# Altium PCB VFD_CLOCK_BASE_BOARD.PcbDoc
Units mm, origin at the board's own origin, x right, y up, seen from the top; angles counter-clockwise.
Board outline 96.52 x 22.23 mm, 2 copper layers (Top Layer, Bottom Layer); 55 components, 56 nets, 214 pads, 42 vias.
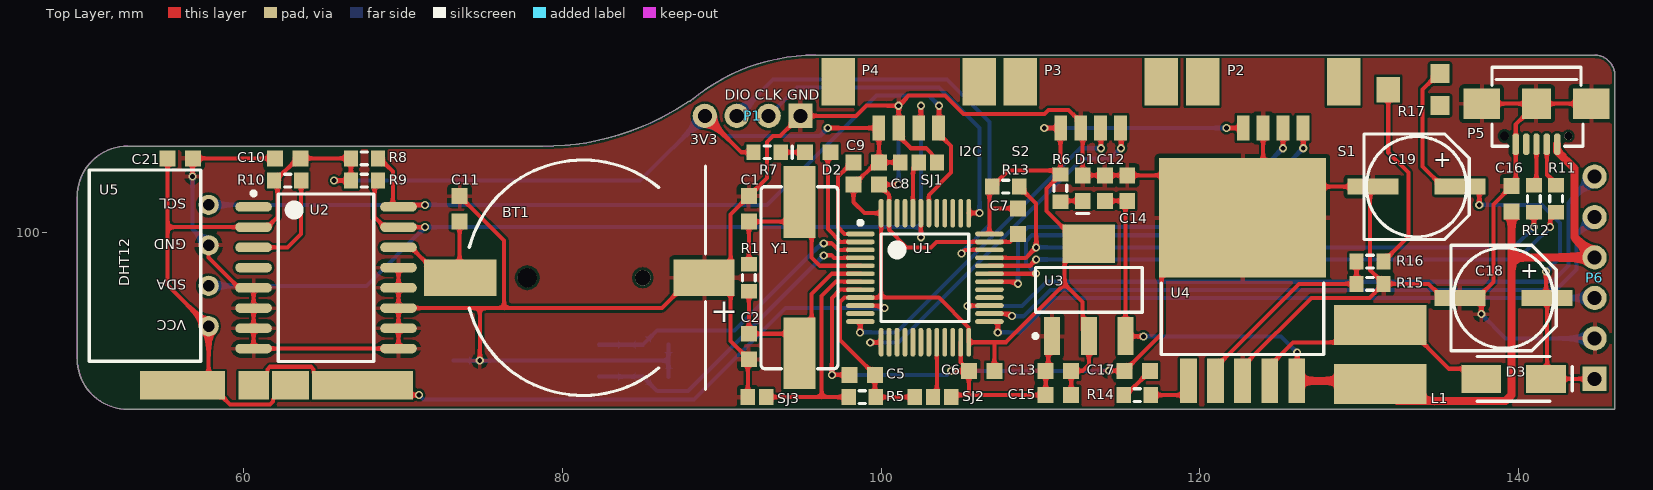
[diagram p0: Top Layer view]
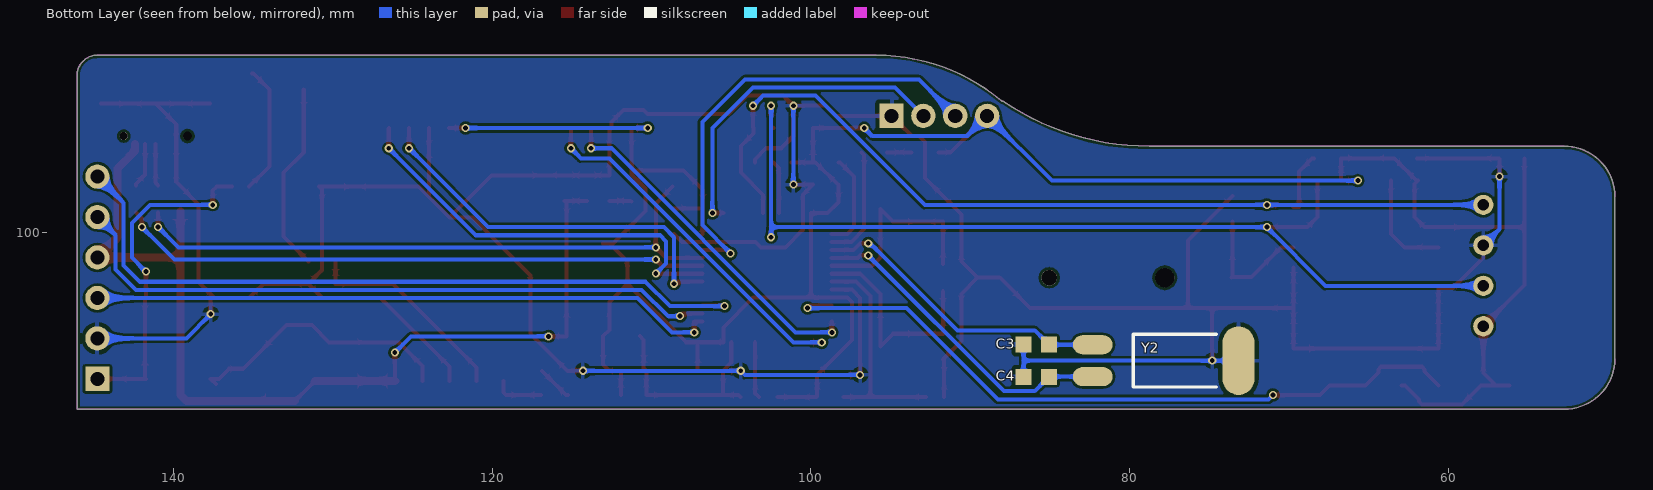
[diagram p1: Bottom Layer view, seen from below]

## Layer stack, top to bottom
Top Solder: solder mask 0.0102, Solder Resist, Dk 3.5
Top Layer: signal copper 0.0356
Dielectric 1: dielectric 0.32, FR-4, Dk 4.8
Bottom Layer: signal copper 0.0356
Bottom Solder: solder mask 0.0102, Solder Resist, Dk 3.5

## Board outline
49.53,92.076 49.53,102.235 cw(c52.705,102.235) 52.705,105.411 78.742,105.411 ccw(c78.789,121.618) 87.925,108.231 88.006,108.231 88.048,108.273 cw(c95.885,98.933) 95.885,111.125 144.78,111.125 cw(c144.78,109.855) 146.05,109.855 146.05,88.9 52.705,88.9 cw(c52.705,92.075)

## Design rules (kind name [scope] priority, off if disabled: settings)
Clearance [All] p1: gap=0.152 ignorepadtopadclearanceinfootprint=FALSE
MinimumSolderMaskSliver [All] p1: minsoldermaskwidth=0.025
PolygonConnect [All] p1: connectstyle=Relief reliefconductorwidth=0.254 reliefentries=4 polygonreliefangle="90 Angle" airgapwidth=0.254
RoutingVias [All] p1: holewidth=0.305 width=0.508 viastyle="Through Hole" minholewidth=0.305 minwidth=0.508 maxholewidth=0.711 maxwidth=1.27
SolderMaskExpansion [All] p1: expansion=0.102
Width [All] p1: maxlimit=0.508 minlimit=0.203 preferedwidth=0.254
29 further rules are at their usual default settings.

## Components (designator, comment, footprint, x,y, rotation, side; value= is the part's Value field where it differs from the comment)
BT1 "CR1220" BAT_CR1220 81.28,97.155 r0 top
C1 "22pF" 0603C_N 91.694,101.473 r270 top value=100pF
C2 "22pF" 0603C_N 91.694,92.837 r90 top value=100pF
C3 "22pF" 0603C_N 85.852,92.964 r180 bottom value=100pF
C4 "22pF" 0603C_N 85.852,90.932 r180 bottom value=100pF
C5 "0.1uF" 0603C_N 98.806,91.059 r0 top value=100pF
C6 "0.1uF" 0603C_N 106.299,91.313 r0 top value=100pF
C7 "0.1uF" 0603C_N 108.585,100.711 r90 top value=100pF
C8 "0.1uF" 0603C_N 99.06,102.997 r180 top value=100pF
C9 "0.1uF" 0603C_N 99.06,104.394 r180 top value=100pF
C10 "0.1uF" 0603C_N 62.738,104.648 r0 top value=100pF
C11 "0.1uF" 0603C_N 73.533,101.473 r270 top value=100pF
C12 "10uF" 0603C_N 114.046,102.781 r270 top value=100pF
C13 "22uF" 0603C_N 111.125,91.313 r0 top value=100pF
C14 "0.1uF" 0603C_N 115.443,102.781 r270 top value=100pF
C15 "0.1uF" 0603C_N 111.125,89.789 r0 top value=100pF
C16 "0.1uF" 0603C_N 139.573,102.108 r270 top value=100pF
C17 "0.33uF" 0603C_N 116.078,91.313 r0 top value=100pF
C18 "10uF" CAP_SMD_SIZE_D_F6.3 139.065,95.885 r180 top value=100pF
C19 "10uF" CAP_SMD_SIZE_D_F6.3 133.604,102.87 r180 top value=100pF
C21 "0.1uF" 0603C_N 56.007,104.648 r180 top value=100pF
D1 "0603RED" 0603LED_N 112.649,102.781 r90 top
D2 "0603YELLOW" 0603LED_N 96.012,105.029 r0 top
D3 "1N5822" SMA 139.7,90.805 r0 top
L1 "47uH" CD54 131.318,92.329 r180 top value=10mH
P1 "SWD" CONNECTER_2.0_1X4 94.932,107.315 r180 top
P2 "Serial1" SH1.25_4P_SMT 124.597,106.553 r0 top
P3 "Serial2" SH1.25_4P_SMT 113.147,106.553 r0 top
P4 "I2C" SH1.25_4P_SMT 101.727,106.553 r0 top
P5 "micro usb" USB_MICRO 141.129,108.077 r180 top
P6 "Header 6" CONNECTER_2.54_1X6 144.78,90.805 r90 top locked
R1 "1M" 0603R_N 91.694,97.155 r90 top value=1K
R5 "10K" 0603R_N 98.806,89.662 r0 top value=1K
R6 "2.2K" 0603R_N 111.252,102.781 r270 top value=1K
R7 "1.5K" 0603R_N 92.837,105.029 r0 top value=1K
R8 "4.7K" 0603R_N 67.564,104.648 r180 top value=1K
R9 "4.7K" 0603R_N 67.564,103.251 r180 top value=1K
R10 "4.7K" 0603R_N 62.738,103.251 r180 top value=1K
R11 "10R" 0603R_N 142.367,102.108 r270 top value=1K
R12 "10R" 0603R_N 140.97,102.108 r270 top value=1K
R13 "1.5K" 0603R_N 107.823,102.87 r180 top value=1K
R14 "2.2K" 0603R_N 116.078,89.789 r180 top value=1K
R15 "1.5K" 0603R_N 130.683,96.774 r0 top value=1K
R16 "10K" 0603R_N 130.683,98.171 r0 top value=1K
R17 "50K" POT_3*3 133.477,108.966 r90 top value=1K
SJ1 "SJ_2" SOLDER_JUMPER_2WAY 102.355,104.394 r0 top
SJ2 "SJ_2" SOLDER_JUMPER_2WAY 103.251,89.662 r0 top
SJ3 "SJ" SOLDER_JUMPER 92.202,89.662 r180 top
U1 "ATmega328-AU" TQFP48_N 102.743,97.155 r0 top
U2 "DS3231" SOIC127P-16N 65.151,97.155 r0 top
U3 "AMS1117-3.3" SOT223-4N 113.03,96.393 r90 top
U4 "LM2577" TO263-5 122.682,100.928 r0 top
U5 "DHT12" DHT12 57.785,97.917 r180 top
Y1 "8M" XTAL_HC-49SMD 94.869,97.155 r90 top
Y2 "32.768k" XTAL-TC26 82.296,91.948 r90 bottom

## Footprints (in the part's own frame and the unit in brackets; to place one, negate y for a bottom-side part, rotate by r counter-clockwise, add the part's x,y. Pads: shape width x height; smd on the part's side, far side on the other; paste and mask are expansions set on the pad)
0603C_N [mm] "Chip Capacitor, Body 1.6x0.8mm, IPC Medium Density"
  rect 1x1 smd: 1(-0.8,0) 2(0.8,0)
  body extent -0.87,-0.48 0.87,0.48, height 0.85
0603LED_N [mm] "Chip LED, Body 1.6x0.8mm, IPC Medium Density"
  rect 1x1 smd: 1(-0.8,0) 2(0.8,0)
  silkscreen extent -1.6,-0.4 -1.6,0.4, body extent -0.82,-0.36 0.82,0.36, height 0.68
0603R_N [mm] "Chip Resistor, Body 1.6x0.8mm, IPC Medium Density"
  rect 0.9x1 smd: 1(-0.85,0) 2(0.85,0)
  silkscreen extent -0.2,-0.4 0.2,0.4, body extent -0.85,-0.48 0.85,0.48, height 0.6
BAT_CR1220 [mm]
  rect 4.572x2.286 smd: 1(-7.7,0)
  rect 3.81x2.286 smd: 2(7.6,0)
  round 1.2 hole 1.2: 3(-3.5,0)
  round 1 hole 1: 3(3.75,0)
  silkscreen extent -7.14,-7.39 7.7,7.39, body extent -9.25,-7.5 9.25,7.5, height 4.05
CAP_SMD_SIZE_D_F6.3 [mm]
  rect 3.2x1 smd: 1(-2.736,0) 2(2.739,0)
  silkscreen extent -3.3,-3.31 3.3,3.31, body extent -3.5,-3.3 3.5,3.3, height 5.25
CD54 [mm]
  rect 5.8x2.5 smd: 1(0,1.85) 2(0,-1.85)
  body extent -2.6,-2.96 2.6,2.96, height 4.5
CONNECTER_2.0_1X4 [mil] "Connector; Header; 4 Position"
  rect 60x60 hole 35: 1(0,0)
  round 60 hole 35: 2(78.74,0) 3(157.48,0) 4(236.22,0)
CONNECTER_2.54_1X6 [mil] "Connector; Header; 6 Position"
  rect 60x60 hole 35: 1(0,0)
  round 60 hole 35: 2(100,0) 3(200,0) 4(300,0) 5(400,0) 6(500,0)
DHT12 [mil]
  round 50 hole 28: 1(0,150) 2(0,50) 3(0,-50) 4(0,-150)
  silkscreen extent 20,-236 295,236, body extent 20,-236 295,236, height 185
POT_3*3 [mm]
  rect 1.2x1.2 smd: 1(-1,-1.6) 3(1,-1.6)
  rect 1.6x1.5 smd: 2(0,1.65)
  body extent -1.8,-1.91 1.8,2.05, height 1.13
SH1.25_4P_SMT [mm]
  rect 0.8x1.6 smd: 1(-1.875,0) 2(-0.625,0) 3(0.625,0) 4(1.875,0)
  rect 2.1x3 smd: 5(-4.425,2.9) 5(4.425,2.9)
  body extent -4.93,-0.77 4.92,4.38, height 3.2
SMA [mm]
  rect 2.5x1.75 smd: 1(-2.032,0) 2(2.032,0)
  silkscreen extent -2.29,-1.4 3.68,1.4, body extent -2.6,-1.3 2.6,1.3, height 2.4
SOIC127P-16N [mm] "SOIC, 16-Leads, Body 10.3x7.5mm, Pitch 1.27mm, IPC Medium Density"
  oval 2.3x0.6 smd: 1(-4.55,4.445) 2(-4.55,3.175) 3(-4.55,1.905) 4(-4.55,0.635) 5(-4.55,-0.635) 6(-4.55,-1.905) 7(-4.55,-3.175) 8(-4.55,-4.445) 9(4.55,-4.445) 10(4.55,-3.175) 11(4.55,-1.905) 12(4.55,-0.635) 13(4.55,0.635) 14(4.55,1.905) 15(4.55,3.175) 16(4.55,4.445)
  silkscreen extent -4.67,-5.25 3,5.42, body extent -5.15,-5.1 5.15,5.1, height 3.5
SOLDER_JUMPER [mm]
  rect 0.9x1 smd: 1(-0.575,0) 2(0.575,0)
SOLDER_JUMPER_2WAY [mm]
  rect 0.9x1 smd: 1(-1.15,0) 2(0,0) 3(1.15,0)
SOT223-4N [mm] "SOT223, 4-Leads, Body 6.5x3.5mm, Pitch 2.3mm, Lead Span 7mm, IPC Medium Density"
  rect 2.4x1 smd: 1(-2.9,2.3) 2(-2.9,0) 3(-2.9,-2.3)
  rect 2.4x3.3 smd: 2(2.9,0)
  silkscreen extent -3.02,-3.35 1.4,3.47, body extent -3.5,-3.25 3.5,3.25, height 1.65
TO263-5 [mm]
  rect 1.05x2.8 smd: 1(-3.4,-10.25) 2(-1.7,-10.25) 3(0,-10.25) 4(1.7,-10.25) 5(3.4,-10.25)
  rect 10.5x7.5 smd: 3(0,0)
  silkscreen extent -5.1,-8.6 5.1,-4.1, body extent -5,-11.09 5,4.58, height 4.83
TQFP48_N [mm] "Thin QFP, 48-Leads, Body 7x7mm, Pitch 0.5mm, IPC Medium Density"
  oval 1.8x0.3 smd: 1(-4.05,2.75) 2(-4.05,2.25) 3(-4.05,1.75) 4(-4.05,1.25) 5(-4.05,0.75) 6(-4.05,0.25) 7(-4.05,-0.25) 8(-4.05,-0.75) 9(-4.05,-1.25) 10(-4.05,-1.75) 11(-4.05,-2.25) 12(-4.05,-2.75) 25(4.05,-2.75) 26(4.05,-2.25) 27(4.05,-1.75) 28(4.05,-1.25) 29(4.05,-0.75) 30(4.05,-0.25) 31(4.05,0.25) 32(4.05,0.75) 33(4.05,1.25) 34(4.05,1.75) 35(4.05,2.25) 36(4.05,2.75)
  oval 0.3x1.8 smd: 13(-2.75,-4.05) 14(-2.25,-4.05) 15(-1.75,-4.05) 16(-1.25,-4.05) 17(-0.75,-4.05) 18(-0.25,-4.05) 19(0.25,-4.05) 20(0.75,-4.05) 21(1.25,-4.05) 22(1.75,-4.05) 23(2.25,-4.05) 24(2.75,-4.05) 37(2.75,4.05) 38(2.25,4.05) 39(1.75,4.05) 40(1.25,4.05) 41(0.75,4.05) 42(0.25,4.05) 43(-0.25,4.05) 44(-0.75,4.05) 45(-1.25,4.05) 46(-1.75,4.05) 47(-2.25,4.05) 48(-2.75,4.05)
  silkscreen extent -4.17,-2.75 2.75,3.57, body extent -4.5,-4.5 4.5,4.5, height 1.63
USB_MICRO [mm] "USB方孔"
  round 0.5 hole 0.5: 0(-2,2.032)
  round 0.5 hole 0.56: 0(2,2.032)
  oct 0.4x1.35 smd: 1(-1.3,2.54) 2(-0.65,2.54) 3(0,2.54) 4(0.65,2.54) 5(1.3,2.54)
  rect 2.286x1.9 smd: 5(-3.429,0) 5(3.429,0)
  rect 1.8x1.9 smd: 5(0,0)
  silkscreen extent -2.92,-2.29 2.79,2.67, body extent -3.99,-2.78 3.99,2.65, height 2.74
XTAL-TC26 [mm]
  oval 1.2x2.5 smd: 1(-1,0) 2(1,0)
  oval 4.3x2 smd: 3(0,-9.144)
  silkscreen extent -1.65,-7.75 1.65,-2.54, body extent -1.7,-9.69 1.75,1.09, height 3.38
XTAL_HC-49SMD [mm]
  rect 4.5x2 smd: 1(-4.75,0) 2(4.75,0)
  silkscreen extent -5.71,-2.41 5.71,2.41, body extent -6.15,-2.35 6.15,2.35, height 4.3

## Part data
BT1: library part Battery, "Multicell Battery", LatestRevisionDate=17-Jul-2002, LatestRevisionNote="Re-released for DXP Platform.", PackageDescription="Battery; 2 Leads", PackageReference=BAT-2, Published=24-Mar-1999, Publisher="Altium Limited"
C1 C2 C3 C4 C5 C6 C7 C8 C9 C10 C11 C12 C13 C14 C15 C16 C17 C21: library part Cap, "Capacitor", LatestRevisionDate=17-Jul-2002, LatestRevisionNote="Re-released for DXP Platform.", PackageDescription="Radial Cap, Thru-Hole; 2 Leads; 0.3 in Pin Spacing", PackageReference=RAD-0.3, Published=8-Jun-2000, Publisher="Altium Limited"
C18 C19: library part "Cap Pol1", "Polarized Capacitor (Radial)", LatestRevisionDate=17-Jul-2002, LatestRevisionNote="Re-released for DXP Platform.", PackageDescription="Polarized Capacitor (Radial); 2 Leads", PackageReference=RB7.6-15, Published=8-Jun-2000, Publisher="Altium Limited"
D1 D2: library part LED0, "Typical INFRARED GaAs LED", LatestRevisionDate=08-Jul-2005, LatestRevisionNote="Mech Layer 1 removed.", PackageDescription="LED; 2 Leads", PackageReference=LED-0, Published=8-Jun-2000, Publisher="Altium Limited"
D3: library part "Diode 11DQ03", "Schottky Rectifier", Code_JEDEC=DO-204-AL, ComponentLink1Description="Manufacturer Link", ComponentLink1URL=http://www.irf.com/, ComponentLink2Description=Datasheet, ComponentLink2URL=http://www.irf.com/product-info/datasheets/data/11dq03.pdf, DatasheetVersion=Dec-1997, LatestRevisionDate=17-Jul-2002, LatestRevisionNote="Re-released for DXP Platform.", PackageDescription="Diode, Axial; Body 5.2 x 2.7 mm (LxDia. max), Lead Dia. 0.86 mm (max)", PackageReference=DO-204AL, Published=8-Jun-2000, Publisher="Altium Limited"
L1: library part Inductor, "Inductor", Code_IEC=1005, Code_JEITA=0402, LatestRevisionDate=29-May-2009, LatestRevisionNote="IPC-7351 Footprint Added.", PackageDescription="Chip Inductor", PackageReference=0402-A, Published=8-Jun-2000, Publisher="Altium Limited"
P1 P2 P3 P4: library part "Header 4", "Header, 4-Pin", LatestRevisionDate=17-Jul-2002, LatestRevisionNote="Re-released for DXP Platform.", Publisher="Altium Limited"
P5: library part "Header 5", "Header, 5-Pin", LatestRevisionDate=17-Jul-2002, LatestRevisionNote="Re-released for DXP Platform.", Publisher="Altium Limited"
P6: "Header, 6-Pin", LatestRevisionDate=17-Jul-2002, LatestRevisionNote="Re-released for DXP Platform.", Publisher="Altium Limited"
R1 R5 R6 R7 R8 R9 R10 R11 R12 R13 R14 R15 R16: library part Res2, "Resistor", LatestRevisionDate=17-Jul-2002, LatestRevisionNote="Re-released for DXP Platform.", PackageDescription="Axial Device, Thru-Hole; 2 Leads; 0.4 in Pin Spacing", PackageReference=AXIAL-0.4, Published=8-Jun-2000, Publisher="Altium Limited"
R17: library part Pot, "Potentiometer", LatestRevisionDate=17-Jul-2002, LatestRevisionNote="Re-released for DXP Platform.", PackageDescription="Variable Resistor, Thru-Hole; 3 Leads", PackageReference=VR5, Published=8-Jun-2000, Publisher="Altium Limited", Set Position=0.5, Sim Note="Enter the Resistance value and the set point into parameter fields."
SJ1 SJ2: library part SOLDER_JUMPER_2WAY, "2-Way Solder Jumper"
SJ3: library part SOLDER_JUMPER, "Solder Jumper"
U1: library part STM32F103C8T6, "STM32 ARM-based 32-bit MCU with 64 Kbytes Flash, 48-pin LQFP, Industrial Temperature", ComponentLink1Description="Manufacturer Link", ComponentLink1URL=www.st.com/stm32, ComponentLink2Description=Datasheet, ComponentLink2URL=http://www.st.com/stonline/products/literature/ds/13587.pdf, DatasheetVersion="rev6, Mar-2008", PackageDescription="48-Pin Low-Profile Quad Flat Pack, 7 x 7 mm Body, 0.5 mm Pitch (LQFP48)", PackageReference=LQFP48, PackageVersion=Mar-2008, Published=30-May-2008, Publisher="Altium Limited"
U3: library part AMS1117, "AMS1117"
Y1 Y2: library part XTAL, "Crystal Oscillator", LatestRevisionDate=17-Jul-2002, LatestRevisionNote="Re-released for DXP Platform.", PackageDescription="Crystal, Thru-Hole; 2 Leads; Body 3.1 x 8.2 mm (Dia.xH)", PackageReference=R38, Published=8-Jun-2000, Publisher="Altium Limited"

## Free pads (board coordinates)
  rect 5.334x1.778 smd: 1(56.134,90.399)
  rect 2.337x1.778 smd: 1(62.916,90.399)
  rect 1.905x1.778 smd: 2(60.604,90.399)
  rect 6.35x1.778 smd: 2(67.437,90.399)

## Via types
v1: diameter 0.508, hole 0.305, Top Layer to Bottom Layer, tented both sides, 42 vias

## Nets (pads, with @x,y where several pads share a name; then routed paths per layer and width w, separated by ;. In a path a pad name is that pad's centre, name@x,y a point inside that pad or via, vN(x,y) a via of type N, cw(c..) or ccw(c..) an arc to the next point about the centre after c; other vN are vias at no path point)
3V3: C5.2 C6.2 C7.2 C8.2 C9.1 C10.2 C13.2 C15.2 C21.2 P1.4 P2.1 P3.1 P4.1 pad.1 R5.2 R6.1 R7.1 R8.2 R9.2 R10.2 R13.2 SJ1.1 SJ2.1 U1.9 U1.24 U1.36 U1.48 U2.2 U3.2 U5.1 | length 167.9
  Top Layer w0.254: C21.2 55.207,100.33 ; pad.1@56.134,90.399 pad.1@56.998,90.399 ; pad.1@62.916,90.399 62.713,90.399 61.836,89.522 61.836,89.394 61.647,89.205 59.131,89.205 57.937,90.399 pad.1@56.998,90.399 ; v1(65.659,103.251) R9.2 R8.2 C10.2 63.369,104.648 61.972,103.251 R10.2 62.103,103.036 62.103,100.965 61.468,100.33 U2.2 55.207,100.33 ; P1.4 91.218,105.029 R7.1 ; v1(96.647,106.553) P4.1 99.86,106.545 C9.1 ; SJ1.1 C9.1 ; SJ2.1 R5.2 99.606,89.712 C5.2 97.409,93.256 97.409,95.631 97.683,95.905 U1.9 99.993,95.905 ; U1.36 106.793,101.473 ; C6.2 107.099,93.067 107.061,93.105 ; C7.2 106.831,101.511 106.793,101.473 ; v1(110.236,106.553) 111.232,106.553 111.252,106.533 R6.1 ; C15.2 C13.2 112.649,91.313 113.03,91.694 113.03,93.493 112.649,93.874 112.649,95.631 111.506,96.774 ; U3.2@113.03,99.293 U3.2@112.628,99.293 ; v1(121.666,106.553) P2.1 ; 55.207,100.33 55.207,96.685 U5.1 57.785,91.186 pad.1@56.998,90.399 ; C9.1 99.691,104.394 98.294,102.997 C8.2 98.26,101.892 98.947,101.205 U1.48 99.993,95.905 ; 99.993,95.905 103.612,95.905 105.493,94.024 U1.24 107.061,93.105 ; 106.793,101.473 106.793,102.69 R13.2 107.989,103.886 110.997,103.886 R6.1 ; 107.061,93.105 107.837,93.105 111.506,96.774 ; R6.1 110.363,102.742 110.363,101.346 112.416,99.293 U3.2@112.628,99.293 ; 111.506,96.774 111.506,98.171 U3.2@112.628,99.293
  Bottom Layer w0.254: v1(65.659,103.251) 84.868,103.251 P1.4 90.202,106.045 96.139,106.045 v1(96.647,106.553) ; v1(110.236,106.553) v1(121.666,106.553)
+5: C12.2 C14.2 C16.2 L1.1 P5.1 P6.4 U3.3 U4.5 | length 61.9
  Top Layer w0.254: C12.2 C14.2 115.33,101.868 U3.3 115.351,93.472 v1(116.459,93.472) ; U4.5 126.111,90.707 v1(126.111,92.456) ; L1.1@131.119,90.678 L1.1 L1.1@132.389,89.408
  Top Layer w0.508: U4.5 L1.1@131.119,90.678 ; L1.1@132.389,89.408 139.192,89.408 139.573,89.789 139.573,98.425 ; C16.2 139.573,98.425 ; P5.1 142.429,105.094 143.51,104.013 143.51,99.695 P6.4 139.573,98.425
  Bottom Layer w0.254: v1(116.459,93.472) 125.095,93.472 v1(126.111,92.456)
BOOT0: SJ1.2 U1.44 | length 3.3
  Top Layer w0.254: U1.44 101.993,104.032 SJ1.2
BOOT1: SJ2.2 U1.20 | length 3.5
  Top Layer w0.254: SJ2.2 103.493,89.904 U1.20
CLOCK: P6.6 U1.27 | length 46.4
  Top Layer w0.254: v1(105.41,95.377) 105.438,95.405 U1.27
  Bottom Layer w0.254: v1(105.41,95.377) 108.839,95.377 110.363,96.901 142.113,96.901 143.129,97.917 143.129,101.854 P6.6
D+: P5.3 R12.1 | length 2.6
  Top Layer w0.254: R12.1 141.129,103.117 P5.3
D-: P5.2 R11.1 | length 2.8
  Top Layer w0.254: P5.2 141.779,103.638 142.367,103.05 R11.1
DIN: P6.3 U1.25 | length 39.6
  Top Layer w0.254: U1.25 107.315,94.405 v1(107.315,93.726)
  Bottom Layer w0.254: v1(107.315,93.726) 108.712,93.726 110.871,95.885 P6.3
GND: BT1.2 C1.1 C2.1 C3.1 C4.1 C5.1 C6.1 C7.1 C8.1 C10.1 C11.1 C12.1 C13.1 C14.1 C15.1 C16.1 C17.1 C18.2 C19.2 C21.1 D1.2 P1.1 P2.2 P3.2 P4.2 P5.5 P6.2 R15.2 SJ1.3 SJ2.3 SJ3.2 U1.8 U1.23 U1.35 U1.47 U2.5 U2.6 U2.7 U2.8 U2.9 U2.10 U2.11 U2.12 U2.13 U3.1 U4.3 U5.3 Y2.3 | length 280.9
  Top Layer w0.254: v1(56.769,103.505) 56.769,104.61 C21.1 C10.1 ; U5.3 57.785,98.425 59.69,96.52 U2.5 U2.6 U2.7 U2.8 U2.9 U2.10 U2.11 ; U2.13 U2.12 U2.11 ; C11.1 76.327,99.479 76.327,95.25 ; v1(74.803,91.948) 74.803,95.25 ; SJ3.2 91.627,91.97 C2.1 90.551,93.18 90.551,96.139 BT1.2@89.535,97.155 ; C5.1 v1(96.901,91.059) 96.901,95.885 97.421,96.405 U1.8 ; v1(101.092,102.997) C8.1 100.493,102.364 U1.47 100.493,100.167 101.6,99.06 103.124,99.06 103.469,99.405 U1.35 108.079,99.405 C7.1 ; SJ1.3 103.505,104.589 102.811,105.283 101.854,105.283 101.102,106.035 P4.2 v1@101.102,107.96 ; v1(104.394,91.313) C6.1 ; SJ2.3 104.528,89.789 105.537,89.789 ; U1.23 104.993,91.819 C6.1 ; U3.1 110.49,93.253 110.49,91.478 C13.1 C15.1 105.537,89.789 ; v1(114.3,91.313) C17.1 117.602,93.637 117.602,97.282 121.248,100.928 U4.3@122.682,100.928 ; U4.3@122.682,90.678 122.682,91.567 127.008,95.893 130.652,95.893 R15.2 ; P2.2 U4.3@123.972,102.218 ; v1(137.668,94.869) 137.668,96.012 C18.2@137.605,96.075 ; P5.5@137.7,108.077 P5.5@141.129,108.077 ; P5.5@144.558,108.077 P5.5@141.129,108.077 ; U2.11 74.803,95.25 ; 74.803,95.25 76.327,95.25 ; 76.327,95.25 86.233,95.25 88.138,97.155 BT1.2 BT1.2@89.535,97.155 ; BT1.2@89.535,97.155 90.551,98.171 90.551,101.13 C1.1 92.837,103.416 92.837,105.664 93.218,106.045 93.662,106.045 P1.1 98.425,107.315 99.07,107.96 v1@101.102,107.96 ; v1@101.102,107.96 101.727,108.585 104.013,108.585 105.156,107.442 110.236,107.442 110.49,107.696 111.76,107.696 112.522,106.934 P3.2 112.649,106.426 D1.2 C12.1 C14.1 120.029,103.581 U4.3@122.682,100.928 ; C6.1 105.499,89.827 105.537,89.789 ; U4.3@122.682,100.928 U4.3@123.972,102.218 ; U4.3@123.972,102.218 124.624,102.87 C19.2 130.683,102.688 130.683,97.624 R15.2 ; R15.2 134.366,96.774 135.255,95.885 C18.2 137.414,95.885 C18.2@137.605,96.075 ; C18.2@137.605,96.075 138.43,96.901 138.43,101.765 C16.1 139.829,103.164 139.829,105.537 139.829,106.777 P5.5@141.129,108.077
  Bottom Layer w0.254: v1(56.769,103.505) 56.769,100.203 U5.3 ; Y2.3 v1(74.803,91.948) 86.652,91.948 ; C4.1 86.652,91.948 ; C3.1 86.652,91.948 ; v1(96.901,91.059) 104.14,91.059 v1(104.394,91.313) v1(114.3,91.313) ; v1(101.092,102.997) v1(101.092,107.95) ; v1(137.668,94.869) 139.192,93.345 P6.2
HV: C18.1 C19.1 D3.2 P6.1 R17.3 | length 29.1
  Top Layer w0.254: R17.3 134.985,109.966 133.985,108.966 133.985,104.14 C19.1@135.255,102.87 ; C19.1 137.287,102.87 137.541,102.616 v1(137.541,101.727) ; v1(141.732,97.536) 141.732,95.954 C18.1 141.801,90.874 D3.2 P6.1
  Bottom Layer w0.254: v1(137.541,101.727) 141.478,101.727 142.621,100.584 142.621,98.425 v1(141.732,97.536)
ID: P5.4
INT: R10.1 U2.3 | length 6.7
  Top Layer w0.254: U2.3 62.738,99.06 63.588,99.91 R10.1
LATCH: P6.5 U1.26 | length 41.9
  Top Layer w0.254: U1.26 108.041,94.905 v1(108.204,94.742)
  Bottom Layer w0.254: v1(108.204,94.742) 108.966,94.742 110.617,96.393 142.367,96.393 143.637,97.663 143.637,99.822 P6.5
NetBT1_1: BT1.1 C11.2 U2.14 | length 8.1
  Top Layer w0.254: U2.14 70.485,99.06 72.343,97.202 BT1.1@73.533,97.202 ; C11.2 BT1.1@73.533,97.202 ; BT1.1 BT1.1@73.533,97.202
NetC1_2: C1.2 R1.2 U1.5 Y1.2 | length 13.3
  Top Layer w0.254: R1.2 C1.2 94.831,100.673 95.631,101.473 95.631,98.425 96.151,97.905 U1.5
NetC2_2: C2.2 R1.1 U1.6 Y1.1 | length 13.8
  Top Layer w0.254: R1.1 C2.2 94.831,93.637 95.631,92.837 95.631,96.139 96.897,97.405 U1.6
NetC3_2: C3.2 U1.3 Y2.2 | length 19.2
  Top Layer w0.254: v1(96.393,99.314) 96.901,99.314 97.31,98.905 U1.3
  Bottom Layer w0.254: Y2.2 85.036,92.948 C3.2 85.941,93.853 90.796,93.853 96.257,99.314 v1(96.393,99.314)
NetC4_2: C4.2 U1.4 Y2.1 | length 20.4
  Top Layer w0.254: v1(96.393,98.552) 96.901,98.552 97.048,98.405 U1.4
  Bottom Layer w0.254: Y2.1 85.036,90.948 C4.2 85.941,90.043 87.884,90.043 v1(96.393,98.552)
NetC9_2: C9.2 U1.1 | length 6.1
  Top Layer w0.254: C9.2 98.171,104.394 97.282,103.505 97.282,100.33 97.707,99.905 U1.1
NetC17_2: C17.2 R14.2 | length 2.3
  Top Layer w0.254: R14.2 115.354,89.789 C17.2
NetD1_1: D1.1 R6.2 | length 1.4
  Top Layer w0.254: R6.2 111.302,101.981 D1.1
NetD2_1: D2.1 R7.2 | length 1.5
  Top Layer w0.254: R7.2 D2.1
NetD3_1: D3.1 L1.2 U4.4 | length 17.1
  Top Layer w0.254: U4.4 124.382,91.616 125.857,93.091 130.23,93.091 L1.2 132.897,94.179 135.636,91.44 136.525,91.44 137.16,90.805 D3.1 D3.1@137.342,90.479
NetR14_1: R14.1 U4.1 | length 3.2
  Top Layer w0.254: R14.1 119.126,89.789 119.282,89.945 U4.1
NetR15_1: R15.1 R16.1 U4.2 | length 13.3
  Top Layer w0.254: U4.2 120.982,91.518 126.238,96.774 R15.1 R16.1
NetR16_2: R16.2 R17.2 | length 12
  Top Layer w0.254: R16.2 133.096,99.734 133.096,103.759 131.827,105.028 R17.2
NRST: R5.1 SJ3.1 U1.7 | length 14.3
  Top Layer w0.254: SJ3.1 96.266,89.662 ; R5.1 96.266,89.662 ; U1.7 97.159,96.905 96.266,96.012 96.266,89.662
PA0: pad.2 U1.10 | length 45.1
  Top Layer w0.254: pad.2@60.604,90.399 61.468,91.262 61.468,91.403 61.632,91.567 64.2,91.567 64.364,91.403 64.364,91.211 65.176,90.399 67.437,90.399 68.047,89.789 v1(70.993,89.789) ; U1.10 100.048,95.405 v1(100.203,95.25)
  Bottom Layer w0.254: v1(70.993,89.789) 71.263,89.519 88.249,89.519 93.98,95.25 v1(100.203,95.25)
PA1: U1.11
PA4: U1.14
PA5: U1.15
PA6: U1.16
PA7: U1.17
PA8: U1.29
PA11: R11.2 U1.32 | length 37.3
  Top Layer w0.254: U1.32 109.335,97.905 v1(109.728,98.298) ; v1(141.986,100.33) 141.986,100.877 R11.2
  Bottom Layer w0.254: v1(109.728,98.298) 139.954,98.298 v1(141.986,100.33)
PA12: R12.2 R13.1 U1.33 | length 40.1
  Top Layer w0.254: U1.33 109.073,98.405 v1(109.728,99.06) 109.728,101.815 R13.1 ; v1(140.97,100.33) R12.2
  Bottom Layer w0.254: v1(109.728,99.06) 139.7,99.06 v1(140.97,100.33)
PA15: U1.38
PB0: U1.18
PB1: U1.19
PB3: U1.39
PB4: U1.40
PB5: U1.41
PB8: U1.45
PB9: U1.46
PB10: U1.21
PB11: U1.22
PB15: U1.28
PC13: D2.2 U1.2 | length 7.3
  Top Layer w0.254: D2.2 96.647,104.864 96.647,100.203 97.445,99.405 U1.2
RX1: P2.4 U1.31 | length 26.3
  Top Layer w0.254: U1.31 109.724,97.405 v1(109.728,97.409) ; P2.4 126.492,106.533 v1(126.492,105.283)
  Bottom Layer w0.254: v1(109.728,97.409) 109.093,98.044 109.093,99.441 109.474,99.822 121.031,99.822 v1(126.492,105.283)
RX2: P3.4 U1.13 | length 22.8
  Top Layer w0.254: v1(99.314,93.091) 99.979,93.091 U1.13 ; P3.4 115.062,106.513 v1(115.062,105.283)
  Bottom Layer w0.254: v1(99.314,93.091) 101.092,93.091 112.649,104.648 114.427,104.648 v1(115.062,105.283)
SCL: P4.4 R8.1 U1.42 U2.16 U5.4 | length 62.2
  Top Layer w0.254: R8.1 68.525,104.648 69.342,103.831 69.342,101.6 U2.16 69.828,101.727 v1(71.374,101.727) ; U1.42 102.993,102.358 104.394,103.759 104.394,105.41 103.602,106.202 P4.4 103.632,106.583 v1(103.632,107.95)
  Bottom Layer w0.254: U5.4 v1(71.374,101.727) 92.837,101.727 99.695,108.585 102.997,108.585 v1(103.632,107.95)
SDA: P4.3 R9.1 U1.43 U2.15 U5.2 | length 63
  Top Layer w0.254: R9.1@68.199,103.124 68.199,100.965 68.834,100.33 U2.15 v1(71.374,100.33) ; P4.3 102.489,106.69 v1(102.489,107.95) ; v1(102.489,99.695) 102.493,99.699 U1.43
  Bottom Layer w0.254: U5.2 67.691,96.647 v1(71.374,100.33) 102.489,100.33 ; v1(102.489,99.695) 102.489,100.33 ; v1(102.489,107.95) 102.489,100.33
SWCLK: P1.2 U1.37 | length 21
  Top Layer w0.254: U1.37 105.507,101.219 v1(106.172,101.219)
  Bottom Layer w0.254: P1.2 94.71,109.093 103.632,109.093 106.172,106.553 v1(106.172,101.219)
SWDIO: P1.3 U1.34 | length 28.8
  Top Layer w0.254: v1(105.029,98.679) 105.255,98.905 U1.34
  Bottom Layer w0.254: P1.3 93.218,109.601 104.14,109.601 106.807,106.934 106.807,100.457 v1(105.029,98.679)
TX1: P2.3 U1.30 | length 25
  Top Layer w0.254: U1.30 108.454,96.905 v1(108.585,96.774) ; v1(125.222,105.283) P2.3
  Bottom Layer w0.254: v1(108.585,96.774) 108.585,99.695 109.22,100.33 120.269,100.33 v1(125.222,105.283)
TX2: P3.3 U1.12 | length 21.9
  Top Layer w0.254: v1(98.679,93.726) 98.679,94.391 U1.12 ; P3.3 113.792,106.533 v1(113.792,105.283)
  Bottom Layer w0.254: v1(98.679,93.726) 100.965,93.726 112.522,105.283 v1(113.792,105.283)
pads on no net: BT1.3 P2.5 P3.5 P4.5 P5.0 R17.1 U2.1 U2.4

## Polygon pours and split planes (outlines as drawn)
GND on Bottom Layer "Bottom Layer-GND" (solid, remove dead copper, pour order 2): 49.53,105.41 49.53,88.9 146.05,88.9 146.05,111.125 145.415,111.125 79.375,111.125 79.375,105.41
GND on Top Layer "Top Layer-GND" (solid, remove dead copper, pour order 4): 49.53,105.41 49.53,88.9 146.05,88.9 146.05,111.125 79.375,111.125 79.375,105.41

## Keep-outs
Keep-Out Layer:
  the board outline again, w0.051

## Silkscreen, mask and mechanical layers (free items; w line width, h text height)
Top Overlay:
  text "DIO" at 90.17,108.331 h0.64
  text "CLK" at 92.075,108.331 h0.64
  text "GND" at 94.107,108.331 h0.64
  text "3V3" at 88.011,105.537 h0.64
  text "I2C" at 104.902,104.775 h0.64
  text "S2" at 108.204,104.775 h0.64
  text "S1" at 128.651,104.775 h0.64
Top Solder:
  text "VFD DISPLAY" at 53.594,89.535 h2.79
Bottom Solder:
  text "Vacuum Fluorescent Display" at 145.288,108.712 h1.52
  text "designed by do335  rev1.0" at 142.24,90.424 h1.02

## Text inside footprints (layer, text, board x,y; h text height)
BT1: Top Overlay "+" at 89.28,94.355 h1.52
C18: Top Overlay "+" at 141.265,97.985 h1.02 r180
C19: Top Overlay "+" at 135.804,104.97 h1.02 r180
U5: Top Overlay "SCL" at 56.388,102.108 h0.64 r180; Top Overlay "GND" at 56.388,99.568 h0.64 r180; Top Overlay "SDA" at 56.388,97.028 h0.64 r180; Top Overlay "VCC" at 56.388,94.488 h0.64 r180